# Altium PCB PCB1.PcbDoc
Units mm, origin at the board's own origin, x right, y up, seen from the top; angles counter-clockwise.
Board outline 73.3 x 111.9 mm, 2 copper layers (Top Layer, Bottom Layer); 121 components, 101 nets, 377 pads, 13 vias.
Unrouted connection lines stored in the file: 260.
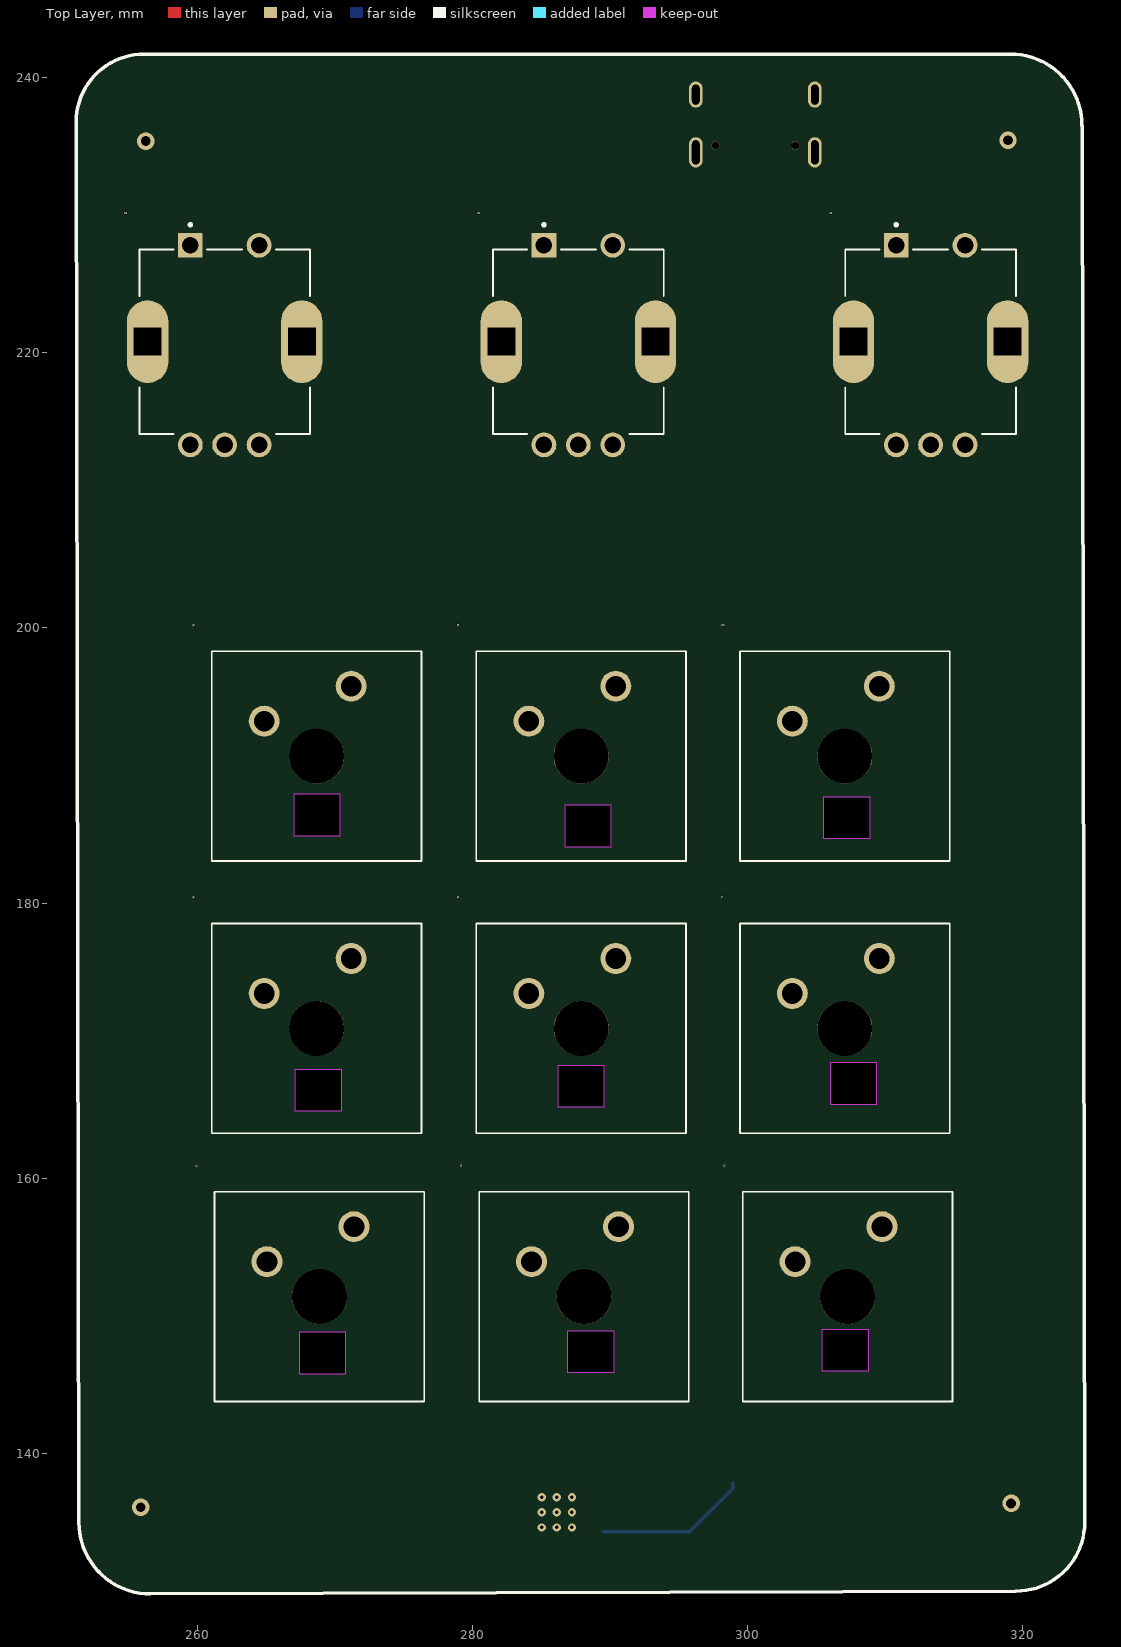
[diagram p0: Top Layer view]
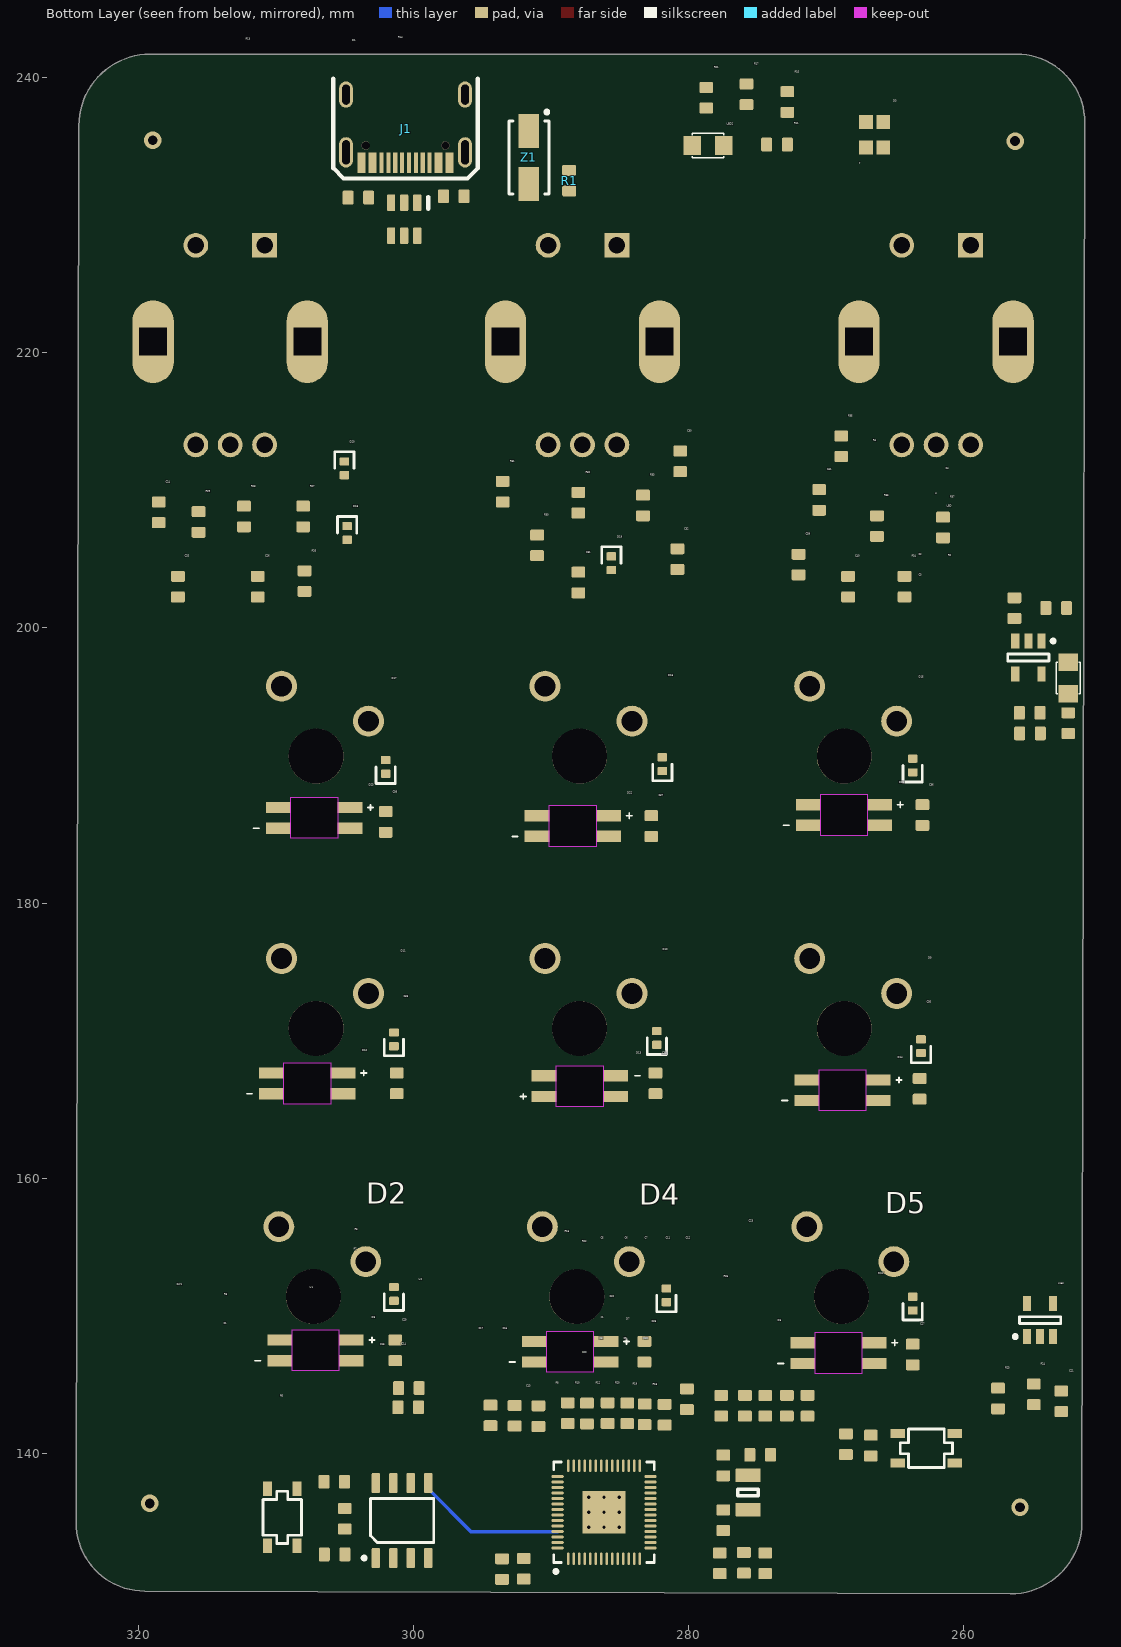
[diagram p1: Bottom Layer view, seen from below]

## Layer stack, top to bottom
Top Solder: solder mask 0.0102, Solder Resist, Dk 3.5
Top Layer: signal copper 0.0356
Dielectric 1: dielectric 0.32, FR-4, Dk 4.8
Bottom Layer: signal copper 0.0356
Bottom Solder: solder mask 0.0102, Solder Resist, Dk 3.5

## Board outline
251.402,134.998 251.2,236.751 cw(c256.149,236.751) 256.149,241.7 319.1,241.7 cw(c319.1,236.502) 324.298,236.502 324.303,236.487 324.5,135 cw(c319.5,135) 319.5,130 256.6,129.8 cw(c256.6,134.998)

## Design rules (kind name [scope] priority, off if disabled: settings)
Clearance [All] p1: gap=0.254 ignorepadtopadclearanceinfootprint=FALSE
ComponentClearance [All] p1 off: gap=0.254 collisioncheckmode=3 verticalgap=0 showdistances=TRUE donotcheckwithout3dbody=TRUE checkcomponentboundary=TRUE
PolygonConnect [All] p1: connectstyle=Relief reliefconductorwidth=0.254 reliefentries=4 polygonreliefangle="90 Angle" airgapwidth=0.254
RoutingVias [All] p1: holewidth=0.711 width=1.27 viastyle="Through Hole" minholewidth=0.711 minwidth=1.27 maxholewidth=0.711 maxwidth=1.27
SolderMaskExpansion [All] p1: expansion=0.102 istentingtop=FALSE
Width [InNet('USB_D+')] p1: maxlimit=0.254 minlimit=0.203 preferedwidth=0.203 minimp=50.000000 maximp=50.000000 favimp=50.000000
29 further rules are at their usual default settings.

## Components (designator, comment, footprint, x,y, rotation, side; value= is the part's Value field where it differs from the comment)
C1 "C0603" CAP_0603 305.74,137.953 r180 bottom
C2 "C0603" CAP_0603 255.207,193.833 r180 bottom
C3 "C0603" CAP_0603 255.182,192.334 r180 bottom
C4 "C0603" CAP_0603 253.275,201.447 r0 bottom
C5 "C0603" CAP_0603 277.622,143.476 r90 bottom
C6 "C0603" CAP_0603 275.895,143.476 r90 bottom
C7 "C0603" CAP_0603 274.422,143.476 r90 bottom
C8 "C0603" CAP_0603 277.724,132.022 r270 bottom
C9 "C0603" CAP_0603 275.971,132.06 r270 bottom
C10 "C0603" CAP_0603 274.422,132.022 r270 bottom
C11 "C0603" CAP_0603 272.847,143.476 r90 bottom
C12 "C0603" CAP_0603 271.348,143.476 r90 bottom
C13 "C0603" CAP_0603 290.905,142.722 r90 bottom
C14 "C0603" CAP_0603 291.973,131.628 r270 bottom
C15 "C0603" CAP_0603 292.632,142.747 r270 bottom
C16 "C0603" CAP_0603 293.548,131.603 r270 bottom
C17 "C0603" CAP_0603 294.384,142.772 r270 bottom
C20 "C0603" CAP_0603 277.47,135.159 r90 bottom
C21 "C0603" CAP_0603 252.9,143.8 r90 bottom
C22 "C0603" CAP_0603 274.789,139.908 r0 bottom
C23 "C0603" CAP_0603 266.751,140.581 r270 bottom
C24 "C0603" CAP_0603 318.5,208.4 r90 bottom
C25 "10nF" CAP_0603 317.1,203 r90 bottom
C26 "10nF" CAP_0603 311.3,203 r90 bottom
C27 "C0603" CAP_0603 263.7,147.2 r90 bottom
C28 "C0603" CAP_0603 283.2,147.4 r90 bottom
C29 "C0603" CAP_0603 301.3,147.5 r90 bottom
C30 "C0603" CAP_0603 280.6,212.1 r90 bottom
C31 "10nF" CAP_0603 288,203.3 r90 bottom
C32 "10nF" CAP_0603 280.8,205 r90 bottom
C33 "C0603" CAP_0603 301.2,166.9 r270 bottom
C34 "C0603" CAP_0603 282.4,166.9 r90 bottom
C35 "C0603" CAP_0603 263.2,166.5 r270 bottom
C36 "C0603" CAP_0603 263,186.4 r90 bottom
C37 "C0603" CAP_0603 282.7,185.6 r90 bottom
C38 "C0603" CAP_0603 302,185.9 r90 bottom
C39 "C0603" CAP_0603 272,204.6 r90 bottom
C40 "10nF" CAP_0603 268.4,203 r90 bottom
C41 "10nF" CAP_0603 270.5,209.3 r90 bottom
D1 "USBLC6-2SC6" SOT-23-6 300.66,229.697 r0 bottom
D2 "D_TVS_0402" D_0402 301.4,151.6 r270 bottom
D3 "150080M153000" 150080M153000 266.462,235.832 r90 bottom
D4 "D_TVS_0402" D_0402 281.6,151.5 r270 bottom
D5 "D_TVS_0402" D_0402 263.7,150.9 r270 bottom
D6 "LED_SK6812-E" LED_SK6812-E 269.1,147.3 r180 bottom
D7 "LED_SK6812-E" LED_SK6812-E 288.6,147.4 r180 bottom
D8 "LED_SK6812-E" LED_SK6812-E 307.1,147.5 r180 bottom
D9 "D_TVS_0402" D_0402 263.1,169.6 r270 bottom
D10 "D_TVS_0402" D_0402 282.3,170.2 r270 bottom
D11 "D_TVS_0402" D_0402 301.4,170.1 r270 bottom
D12 "LED_SK6812-E" LED_SK6812-E 307.7,166.9 r180 bottom
D13 "LED_SK6812-E" LED_SK6812-E 287.9,166.7 r0 bottom
D14 "LED_SK6812-E" LED_SK6812-E 268.8,166.4 r180 bottom
D15 "D_TVS_0402" D_0402 263.7,190 r270 bottom
D16 "D_TVS_0402" D_0402 281.9,190.1 r270 bottom
D17 "D_TVS_0402" D_0402 302,189.9 r270 bottom
D18 "D_TVS_0402" D_0402 304.8,206.9 r90 bottom
D19 "D_TVS_0402" D_0402 285.6,204.7 r90 bottom
D20 "D_TVS_0402" D_0402 305,211.6 r90 bottom
D21 "LED_SK6812-E" LED_SK6812-E 268.7,186.4 r180 bottom
D22 "LED_SK6812-E" LED_SK6812-E 288.4,185.6 r180 bottom
D23 "LED_SK6812-E" LED_SK6812-E 307.2,186.2 r180 bottom
J1 "TYPE-C-31-M-12" TYPE-C-31-M-12 300.558,236.657 r0 bottom
J2 "keyboard" SWITCH_keyboard 307.261,151.405 r0 top
J3 "keyboard" SWITCH_keyboard 288.109,151.405 r0 top
J4 "keyboard" SWITCH_keyboard 268.881,151.405 r0 top
J5 "keyboard" SWITCH_keyboard 268.681,170.896 r0 top
J6 "keyboard" SWITCH_keyboard 287.909,170.896 r0 top
J7 "keyboard" SWITCH_keyboard 307.061,170.896 r0 top
J8 "keyboard" SWITCH_keyboard 268.681,190.683 r0 top
J9 "keyboard" SWITCH_keyboard 287.909,190.683 r0 top
J10 "keyboard" SWITCH_keyboard 307.061,190.683 r0 top
LED "LED_0805_RED" LED-0805-Red 252.4,195.23 r90 bottom
LED2 "LED_0805_RED" LED-0805-Red 277.426,235.051 r0 bottom
R1 "R0603" RES_0603 288.671,232.503 r270 bottom
R2 "R0603" RES_0603 252.4,193.084 r90 bottom
R3 "R0603" RES_0603 304.978,135.26 r270 bottom
R4 "R0603" RES_0603 256.311,201.439 r90 bottom
R5 "R0603" RES_0603 305.714,132.669 r0 bottom
R6 "R0603" RES_0603 300.316,144.76 r0 bottom
R7 "R0603" RES_0603 300.367,143.363 r0 bottom
R8 "R0603" RES_0603 288.771,142.937 r90 bottom
R10 "R0603" RES_0603 287.374,142.911 r90 bottom
R11 "R0603" RES_0603 273.565,235.127 r180 bottom
R12 "R0603" RES_0603 285.875,142.937 r90 bottom
R13 "R0603" RES_0603 303.987,231.272 r180 bottom
R14 "R0603" RES_0603 297.053,231.374 r0 bottom
R15 "R0603" RES_0603 272.812,238.219 r90 bottom
R16 "R0603" RES_0603 280.111,143.947 r90 bottom
R17 "R0603" RES_0603 275.784,238.778 r90 bottom
R18 "R0603" RES_0603 281.735,142.823 r90 bottom
R19 "R0603" RES_0603 283.183,142.849 r90 bottom
R20 "R0603" RES_0603 284.453,142.925 r90 bottom
R21 "R0603" RES_0603 278.705,238.524 r90 bottom
R22 "R0603" RES_0603 277.47,139.134 r270 bottom
R23 "R0603" RES_0603 257.5,144 r90 bottom
R24 "R0603" RES_0603 254.9,144.3 r90 bottom
R25 "R0603" RES_0603 268.554,140.682 r90 bottom
R26 "10k" RES_0603 307.9,203.4 r90 bottom
R27 "10k" RES_0603 308,208.1 r90 bottom
R28 "10k" RES_0603 312.3,208.1 r90 bottom
R29 "10k" RES_0603 315.6,207.7 r90 bottom
R30 "10k" RES_0603 291,206 r90 bottom
R31 "10k" RES_0603 293.5,209.9 r90 bottom
R32 "10k" RES_0603 288,209.1 r90 bottom
R33 "10k" RES_0603 283.3,208.9 r90 bottom
R34 "10k" RES_0603 264.3,203 r90 bottom
R35 "10k" RES_0603 268.9,213.2 r90 bottom
R36 "10k" RES_0603 266.3,207.4 r90 bottom
R37 "10k" RES_0603 261.5,207.3 r90 bottom
S1 "PEC12R-4120F-S0012" XDCR_PEC12R-4120F-S0012 313.3,220.8 r0 top
S2 "PEC12R-4120F-S0012" XDCR_PEC12R-4120F-S0012 287.7,220.8 r0 top
S3 "PEC12R-4120F-S0012" XDCR_PEC12R-4120F-S0012 262,220.8 r0 top
SW1 "SKRPANE010" SKRPANE010 309.524,135.362 r270 bottom
SW2 "SKRPANE010" SKRPANE010 262.712,140.391 r0 bottom
U "AP2112K-3.3" "SOT23 - 5 Leads" 255.295,197.846 r270 bottom
U1 "W25Q128JVSIM" SOIC-8 300.812,135.133 r90 bottom
U2 "RP2040" QFN-56-EP 286.134,135.733 r90 bottom
Uled "U" "SOT23 - 5 Leads" 254.45,149.7 r90 bottom
X1 "XTAL_3215" XTAL_3215-2 275.666,137.171 r270 bottom
Z1 "Diode  Zener" "DIODE SMA" 291.592,234.188 r270 bottom

## Footprints (in the part's own frame and the unit in brackets; to place one, negate y for a bottom-side part, rotate by r counter-clockwise, add the part's x,y. Pads: shape width x height; smd on the part's side, far side on the other; paste and mask are expansions set on the pad)
150080M153000 [mm]
  rect 1x1 smd mask+0.15: 1(0.925,0.625) 2(0.925,-0.625) 3(-0.925,-0.625) 4(-0.925,0.625)
  body extent -1,-0.65 1,0.65, height 0.51
CAP_0603 [mm]
  rrect25% 0.8x1 smd: 1(-0.75,0) 2(0.75,0)
  body extent -0.8,-0.4 0.8,0.4, height 0.51
D_0402 [mm]
  rrect25% 0.6x0.7 smd: A(-0.5,0) K(0.5,0)
  silkscreen extent 0,-0.7 1.2,0.7, body extent -0.5,-0.25 0.5,0.25, height 0.51
"DIODE SMA" [mm]
  rect 2.45x1.5 smd: 1(-1.925,0) 2(1.925,0)
  silkscreen extent -3.42,-1.45 2.65,1.45, body extent -2.8,-1.48 2.8,1.47, height 2.7
LED-0805-Red [mil]
  rect 50x55 smd: 1(0,0) 2(90,0)
  silkscreen extent 0,-35 90,35, body extent 5,-25 85,25, height 43
LED_SK6812-E [mm]
  rect 1.8x0.82 smd: 1(2.6,0.75) 2(2.6,-0.75) 3(-2.6,-0.75) 4(-2.6,0.75)
  Keep-Out Layer board cut-out: 1.7,1.5 1.7,-1.5 -1.7,-1.5 -1.7,1.5
  silkscreen extent -4.4,-0.75 4.3,0.95, body extent -2.94,-1.4 2.94,1.4, height 0.94
QFN-56-EP [mm]
  oval 0.9x0.2 smd mask+0.15: 1(-3.375,2.6) 2(-3.375,2.2) 3(-3.375,1.8) 4(-3.375,1.4) 5(-3.375,1) 6(-3.375,0.6) 7(-3.375,0.2) 8(-3.375,-0.2) 9(-3.375,-0.6) 10(-3.375,-1) 11(-3.375,-1.4) 12(-3.375,-1.8) 13(-3.375,-2.2) 14(-3.375,-2.6) 29(3.375,-2.6) 30(3.375,-2.2) 31(3.375,-1.8) 32(3.375,-1.4) 33(3.375,-1) 34(3.375,-0.6) 35(3.375,-0.2) 36(3.375,0.2) 37(3.375,0.6) 38(3.375,1) 39(3.375,1.4) 40(3.375,1.8) 41(3.375,2.2) 42(3.375,2.6)
  oval 0.2x0.9 smd mask+0.15: 15(-2.6,-3.375) 16(-2.2,-3.375) 17(-1.8,-3.375) 18(-1.4,-3.375) 19(-1,-3.375) 20(-0.6,-3.375) 21(-0.2,-3.375) 22(0.2,-3.375) 23(0.6,-3.375) 24(1,-3.375) 25(1.4,-3.375) 26(1.8,-3.375) 27(2.2,-3.375) 28(2.6,-3.375) 43(2.6,3.375) 44(2.2,3.375) 45(1.8,3.375) 46(1.4,3.375) 47(1,3.375) 48(0.6,3.375) 49(0.2,3.375) 50(-0.2,3.375) 51(-0.6,3.375) 52(-1,3.375) 53(-1.4,3.375) 54(-1.8,3.375) 55(-2.2,3.375) 56(-2.6,3.375)
  rect 3.1x3.1 smd: 57(0,0)
  silkscreen extent -4.42,-3.65 3.65,3.65, body extent -3.51,-3.51 3.51,3.51, height 1.01
RES_0603 [mm]
  rrect25% 0.8x1 smd: 1(-0.75,0) 2(0.75,0)
  body extent -0.8,-0.43 0.8,0.43, height 0.52
SKRPANE010 [mm]
  rect 1.05x0.65 smd: 12(-2.075,1.075) 12(2.075,1.075) 34(-2.075,-1.075) 34(2.075,-1.075)
  silkscreen extent -1.9,-1.4 1.9,1.4, body extent -2.3,-1.6 2.3,1.6, height 2.51
SOIC-8 [mm] "SOIC, 8-Leads, Body 4.91x3.90mm, Pitch 1.27mm, IPC Medium Density"
  rrect25% 1.45x0.6 smd: 1(-2.725,1.905) 2(-2.725,0.635) 3(-2.725,-0.635) 4(-2.725,-1.905) 5(2.725,-1.905) 6(2.725,-0.635) 7(2.725,0.635) 8(2.725,1.905)
  silkscreen extent -2.85,-2.3 1.6,2.88, body extent -3,-2.5 3,2.5, height 1.75
"SOT23 - 5 Leads" [mm]
  rect 1.1x0.6 smd: 1(-1.2,0.95) 2(-1.2,0) 3(-1.2,-0.95) 4(1.2,-0.95) 5(1.2,0.95)
  silkscreen extent -1.32,-1.5 0.25,1.92, body extent -1.4,-1.45 1.4,1.45, height 1.45
SOT-23-6 [mm]
  rrect25% 0.6x1.2 smd: 1(-0.95,-1.2) 2(0,-1.2) 3(0.95,-1.2) 4(0.95,1.2) 5(0,1.2) 6(-0.95,1.2)
  silkscreen extent -1.75,-1.63 -1.75,-0.76, body extent -1.45,-1.4 1.45,1.4, height 1.45
SWITCH_keyboard [mm]
  round 2.25 hole 1.5: P$1(2.51,5.08) P$2(-3.81,2.54)
  round 3.988 hole 3.988 unplated: ""(0,0)
  silkscreen extent -7.62,-7.62 7.62,7.62, body extent -9.04,-9.13 8.96,8.87, height 19.25
TYPE-C-31-M-12 [mm]
  rect 0.6x1.5 smd mask+0.07: A1B12(-3.2,2.85) B1A12(3.2,2.85)
  rect 0.6x1.5 smd mask+0.14: A4B9(-2.4,2.85) B4A9(2.4,2.85)
  rect 0.3x1.5 smd mask+0.14: A5(-1.25,2.85) A6(-0.25,2.85) A7(0.25,2.85) A8(1.25,2.85) B5(1.75,2.85) B6(0.75,2.85) B7(-0.75,2.85) B8(-1.75,2.85)
  round 0.6 hole 0.6 unplated mask+0.3: MH(-2.9,1.6) MH(2.9,1.6)
  oval 1x1.9 hole 0.55 slot 1.45 at 90 deg mask+0.05: SH(-4.325,-2.1) SH(4.325,-2.1)
  oval 1x2.2 hole 0.55 slot 1.75 at 90 deg mask+0.05: SH(-4.325,2.1) SH(4.325,2.1)
  silkscreen extent -5.25,-3.25 5.25,4, body extent -4.47,-4.65 4.47,3.25, height 3.32
XDCR_PEC12R-4120F-S0012 [mm]
  rect 1.8x1.8 / inner round 1.8 / far side rect 1.8x1.8 hole 1.2: 1(-2.5,7)
  round 1.8 hole 1.2: 2(2.5,7) A(-2.5,-7.5) B(2.5,-7.5) C(0,-7.5)
  oval 3x6 hole 2 square: SH1(-5.6,0) SH2(5.6,0)
  silkscreen extent -6.2,-6.7 6.2,8.6, body extent -7,-7.7 7,7.2, height 20.5
XTAL_3215-2 [mm]
  rrect10% 1x1.8 smd: 1(-1.25,0) 2(1.25,0)
  silkscreen extent -0.25,-0.75 0.25,0.75, body extent -1.6,-0.75 1.6,0.75, height 0.91

## Part data
C1 C2 C3 C4 C5 C6 C7 C8 C9 C10 C11 C12 C13 C14 C15 C16 C17 C20 C21 C22 C23 C24 C25 C26 C27 C28 C29 C30 C31 C32 C33 C34 C35 C36 C37 C38 C39 C40 C41: library part CAP_0603, "Capacitor SMD 0603"
D1: "Low-Capacitance ESD Protection USB", Manufacturer=STMicroelectronics, Distributor Link=https://www.mouser.de/ProductDetail/STMicroelectronics/USBLC6-2SC6?qs=po45yt2pPpu%2FhNIlwQdTlg%3D%3D, Manufacturer Part Number=USBLC6-2SC6
D2 D4 D5 D9 D10 D11 D15 D16 D17 D18 D19 D20: "Diode TVS / ESD 0402"
D3: library part "LED RGB", "RGB LED Common Anode SMD Diffused 0805 Top View", Manufacturer=Wurth, Distributor Link=https://www.mouser.de/ProductDetail/Wurth-Elektronik/150080M153000?qs=5aG0NVq1C4wI5cZ2wabu5A%3D%3D, Manufacturer Part Number=150080M153000
D6 D7 D8 D12 D13 D14 D21 D22 D23: "SK6812MINI-E is a smart LED control circuit and light emitting circuit in one controlled LED source, which has the shape of a 3528 LED chip.", Package=Package, Check_prices=https://www.snapeda.com/parts/SK6812-E/DONGGUANG+OPSCO+OPTOELECTRONICS+CO.%252C+LTD/view-part/?ref=eda, MF="DONGGUANG OPSCO OPTOELECTRONICS CO., LTD", MP=SK6812-E, SnapEDA_Link=https://www.snapeda.com/parts/SK6812-E/DONGGUANG+OPSCO+OPTOELECTRONICS+CO.%252C+LTD/view-part/?ref=snap
J1: "USB Type C Connector Horizontal SMT", Manufacturer="Koren Hroparts", Manufacturer Part Number=TYPE-C-31-M-12
J2 J3 J4 J5 J6 J7 J8 J9 J10: "Switch,Key,SPST-NO,Keyboard,Low Profile,10mA,12VDC,Face Place Mount,Std Force", Package=None, Check_prices=https://www.snapeda.com/parts/MX1A-11NN/Cherry/view-part/?ref=eda, MF=Cherry, MP=MX1A-11NN, SnapEDA_Link=https://www.snapeda.com/parts/MX1A-11NN/Cherry/view-part/?ref=snap
R1 R2 R3 R4 R5 R6 R7 R8 R10 R11 R12 R13 R14 R15 R16 R17 R18 R19 R20 R21 R22 R23 R24 R25 R26 R27 R28 R29 R30 R31 R32 R33 R34 R35 R36 R37: library part RES_0603, "Resistor SMD 0603"
S1 S2 S3: "Mechanical Encoder Rotary Incremental Flat 0.007N.m Straight Quadrature Digital Square Wave 12PPR Through Hole PC Pin", Package=None, Check_prices=https://www.snapeda.com/parts/PEC12R-4120F-S0012/Bourns/view-part/?ref=eda, MF="Bourns Inc.", MP=PEC12R-4120F-S0012, SnapEDA_Link=https://www.snapeda.com/parts/PEC12R-4120F-S0012/Bourns/view-part/?ref=snap
SW1 SW2: "Tactile Switch SMD SPST", Manufacturer="Alps Alpine", Manufacturer Part Number=SKRPANE010
U1: "128M-BIT / SERIAL FLASH MEMORY WITH / DUAL/QUAD SPI & QPI & DTR SOIC-8", Manufacturer=Winbond, Manufacturer Part Number=W25Q128JVSIM
U2: "32-Bit Dual-Core ARM Cortex-M0+ Microcontroller", Manufacturer="Raspberry Pi", Manufacturer Part Number=RP2040
Uled: library part SN74LV1T34DBVR
X1: "Crystal SMD 3215"
Z1: library part "Diode Zener"

## Via types
v1: diameter 0.6, hole 0.25, Top Layer to Bottom Layer, 9 vias
v2: diameter 1.27, hole 0.711, Top Layer to Bottom Layer, 4 vias

## Nets (pads, with @x,y where several pads share a name; then routed paths per layer and width w, separated by ;. In a path a pad name is that pad's centre, name@x,y a point inside that pad or via, vN(x,y) a via of type N, cw(c..) or ccw(c..) an arc to the next point about the centre after c; other vN are vias at no path point)
3.3V: C2.2 C3.2 C24.2 C30.2 C39.2 R2.1 R26.2 R27.2 R30.2 R31.2 R34.2 R35.2 U.5
5V_LED: C27.2 C28.2 C29.2 C33.1 C34.1 C35.1 C36.2 C37.2 C38.2 D6.1 D7.1 D8.1 D12.1 D13.1 D14.1 D21.1 D22.1 D23.1 R1.2
5V_SYS: C4.2 R1.1 R4.2 U.1 Z1.2
5V_USB: C21.2 D1.5 J1.A4B9 J1.B4A9 Z1.1
+1V1: C13.1 C15.2 C17.2 U2.23 U2.45 U2.50
+3V3: C1.2 C5.1 C6.1 C7.1 C8.1 C9.1 C10.1 C11.1 C12.1 C14.1 C16.1 D3.4 R3.1 R25.2 U1.8 U2.1 U2.10 U2.22 U2.33 U2.42 U2.43 U2.44 U2.48 U2.49
ADC0: R15.1 U2.38
ADC1: R17.1 U2.39
ADC2: R21.1 U2.40
C0: C25.2 J2.P$1 J5.P$1 J8.P$1 R8.2 R28.2
C1: C31.2 J3.P$1 J6.P$1 J9.P$1 R10.2 R32.2
C2: C40.2 J4.P$1 J7.P$1 J10.P$1 R12.2 R36.2
ENC1_A: S1.1 U2.18
ENC1_B: S1.2 U2.27
ENC1_SW: C26.2 D18.A R29.2
ENC2_A: S2.1 U2.28
ENC2_B: S2.2 U2.29
ENC2_SW: C32.2 D19.A R33.2
ENC3_A: S3.1 U2.30
ENC3_B: S3.2 U2.31
ENC3_SW: C41.2 D20.A R37.2
GND: C1.1 C2.1 C3.1 C4.1 C5.2 C6.2 C7.2 C8.2 C9.2 C10.2 C11.2 C12.2 C13.2 C14.2 C15.1 C16.2 C17.1 C20.1 C21.1 C22.1 C23.1 C24.1 C25.1 C26.1 C27.1 C28.1 C29.1 C30.1 C31.1 C32.1 C33.2 C34.2 C35.2 C36.1 C37.1 C38.1 C39.1 C40.1 C41.1 D1.2 D6.3 D7.3 D8.3 D12.3 D13.3 D14.3 D21.3 D22.3 D23.3 LED2.2 LED.2 R13.1 R14.1 S1.C S1.SH1 S1.SH2 S2.C S2.SH1 S2.SH2 S3.C S3.SH1 S3.SH2 SW1.34 SW2.34 U1.4 U2.19 U2.57 U.2 U.4 Uled.3
  other v1: 285.034,134.633 286.134,134.633 287.234,134.633 285.034,135.733 286.134,135.733 287.234,135.733 285.034,136.833 286.134,136.833 287.234,136.833
IO0: R8.1 U2.2
IO1: R10.1 U2.3
IO2: R12.1 U2.4
IO3: U2.5
IO4: U2.6
IO5: U2.7
IO6: U2.8
IO7: U2.9
IO8: R16.1 U2.11
IO9: R18.1 U2.12
IO10: R19.1 U2.13
IO11: R20.1 U2.14
IO12: U2.15
IO13: U2.16
IO14: U2.17
IO21: U2.32
IO22: U2.34
IO23: U2.35
IO24: R23.1 U2.36
IO25: U2.37
LED0_BUF: R23.2 R24.1
LED0_DIN: D6.4 Uled.4
NetC22_2: C22.2 R22.1 X1.1
NetD1_1: D1.1 J1.A7 J1.B7
NetD1_3: D1.3 J1.A6 J1.B6
NetD2_A: D2.A J2.P$2
NetD3_1: D3.1 R15.2
NetD3_2: D3.2 R17.2
NetD3_3: D3.3 R21.2
NetD4_A: D4.A J3.P$2
NetD5_A: D5.A J4.P$2
NetD6_2: D6.2 D7.4
NetD7_2: D7.2 D8.4
NetD8_2: D8.2 D12.4
NetD9_A: D9.A J5.P$2
NetD10_A: D10.A J6.P$2
NetD11_A: D11.A J7.P$2
NetD12_2: D12.2 D13.4
NetD13_2: D13.2 D14.4
NetD14_2: D14.2 D21.4
NetD15_A: D15.A J8.P$2
NetD16_A: D16.A J9.P$2
NetD17_A: D17.A J10.P$2
NetD21_2: D21.2 D22.4
NetD22_2: D22.2 D23.4
NetJ1_A1B12: J1.A1B12 J1.B1A12 J1.SH
NetJ1_A5: J1.A5 R14.2
NetJ1_B5: J1.B5 R13.2
NetLED2_1: LED2.1 R11.2
NetLED_1: LED.1 R2.2
NetR4_1: R4.1 U.3
NetR5_2: R5.2 SW1.12
NetR6_1: R6.1 U2.47
NetR7_1: R7.1 U2.46
NetR24_2: R24.2 Uled.1 Uled.2
NetR26_1: R26.1 R28.1 S1.A
NetR27_1: R27.1 R29.1 S1.B
NetR30_1: R30.1 R32.1 S2.A
NetR31_1: R31.1 R33.1 S2.B
NetR34_1: R34.1 R36.1 S3.A
NetR35_1: R35.1 R37.1 S3.B
R0: D2.K D4.K D5.K R16.2
R1: D9.K D10.K D11.K R18.2
R2: D15.K D16.K D17.K R19.2
R3: D18.K D19.K D20.K R20.2
RUN: C23.2 R25.1 SW2.12 U2.26
SPI_SCLK: U1.6 U2.52
SPI_SD0: U1.5 U2.53 | length 11.1
  Bottom Layer w0.254: U2.53 295.807,134.333 298.907,137.433 U1.5
SPI_SD1: U1.2 U2.55
SPI_SD2: U1.3 U2.54
SPI_SD3: U1.7 U2.51
SPI_SS: R3.2 R5.1 U1.1 U2.56
SWCLK: U2.24
SWDIO: U2.25
USB_D+: D1.4 R6.2
USB_D-: D1.6 R7.2
USER_LED1: R11.1
XIN: C20.2 U2.20 X1.2
XOUT: R22.2 U2.21
pads on no net: D23.2 J1.A8 J1.B8 J1.MH J2. J3. J4. J5. J6. J7. J8. J9. J10. U2.41 Uled.5
copper on no net:
  other v2: 255.905,136.093 319.151,136.373 256.261,235.382 318.922,235.433

## Silkscreen, mask and mechanical layers (free items; w line width, h text height)
Top Overlay:
  lines w0.254: 324.298,236.502 ccw(c319.1,236.502) 319.1,241.7 305.9,241.7 256.149,241.7 ccw(c256.149,236.751) 251.2,236.751 251.402,134.998 ccw(c256.6,134.998) 256.6,129.8 319.5,130 ccw(c319.5,135) 324.5,135 324.303,236.487

## Text inside footprints (layer, text, board x,y; h text height)
D3: Mechanical 13 "+" at 267.962,233.248 h0.13 r270; Bottom Overlay "+" at 267.462,233.698 h0.13 r270